# EAGLE board ReactionGame (EAGLE 6.0)
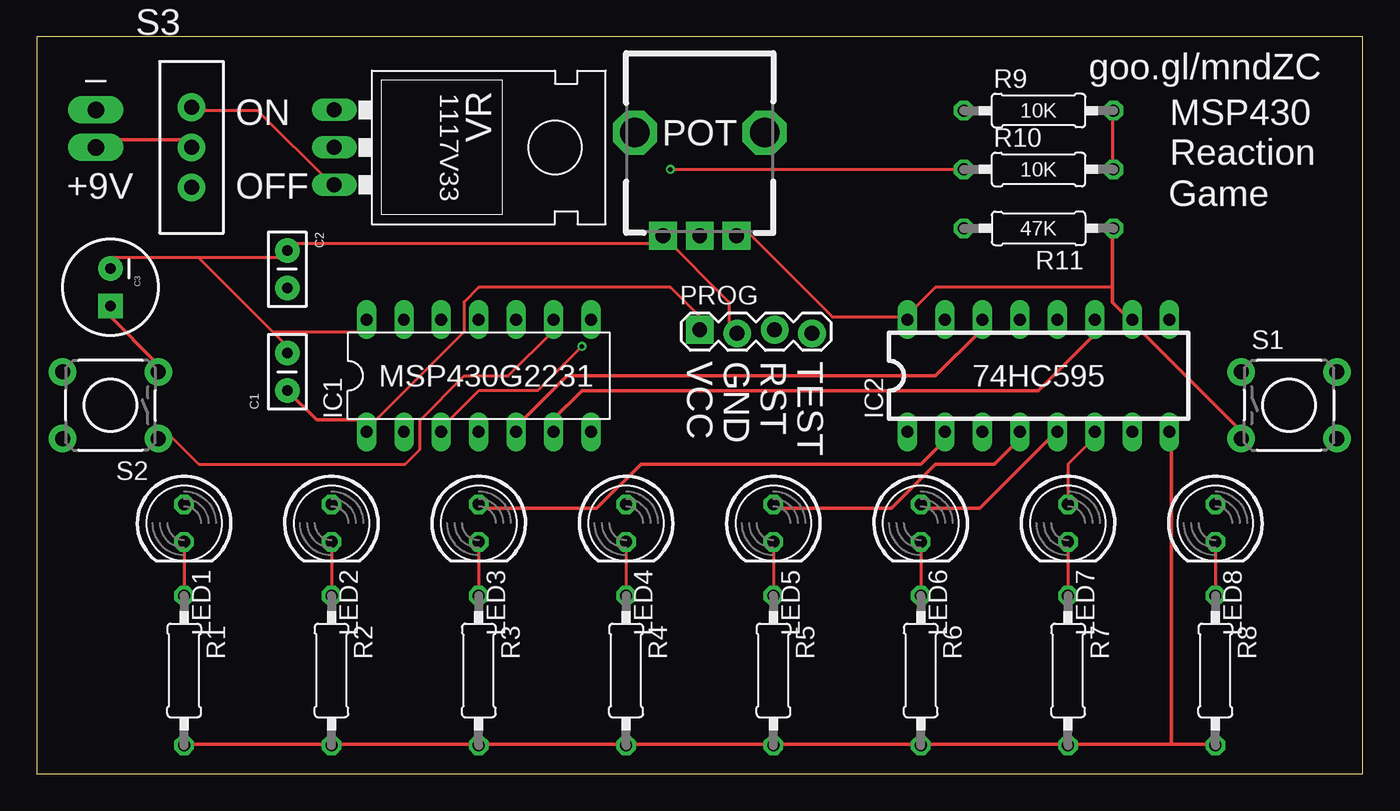
[diagram p0: board, top side]
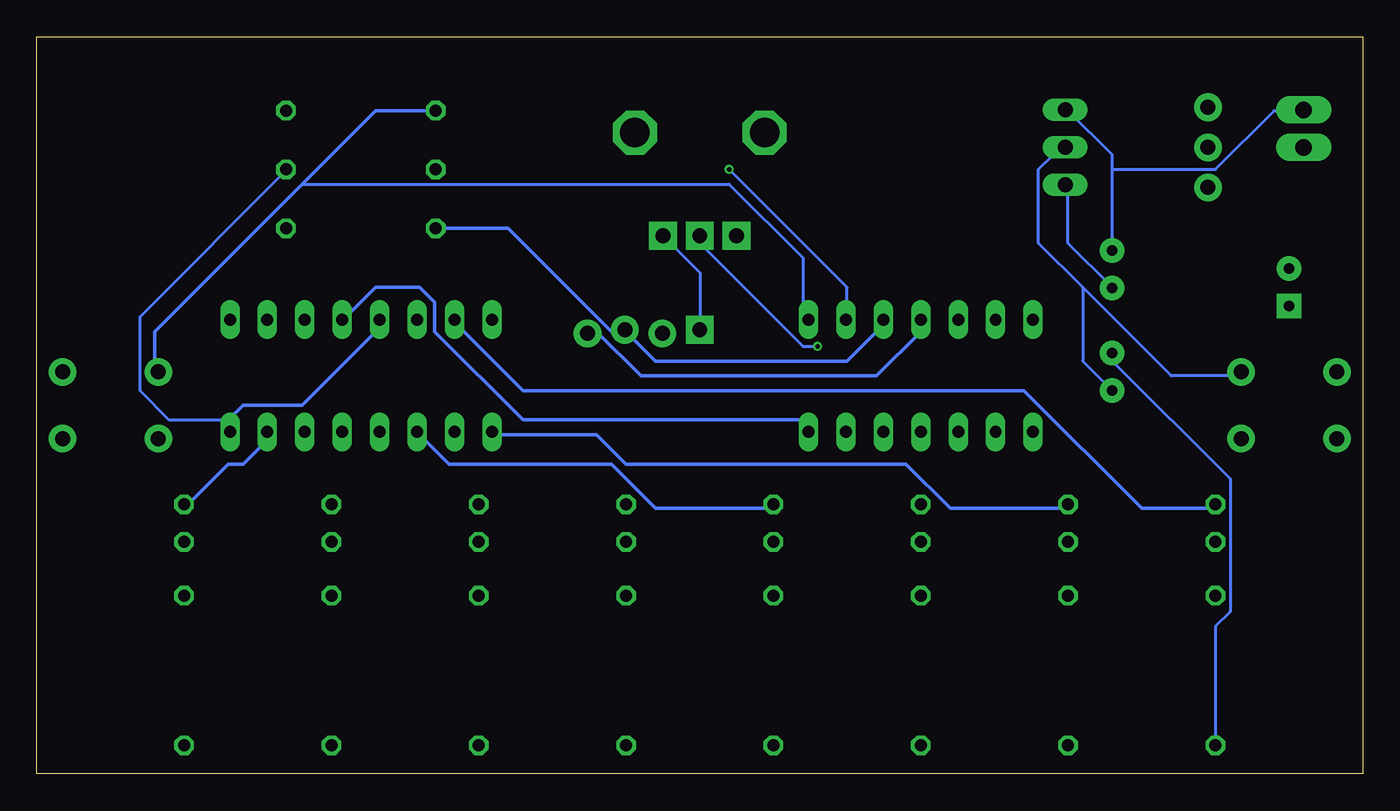
[diagram p1: board, bottom side, seen from below]

Size 90 x 50 mm. Coordinates in mm from the lower left corner, seen from the top.
Outline: 0,0 90,0 90,50 0,50 0,0
Copper layers (1*16): Top 0.035mm / dielectric 1.5mm / Bottom 0.035mm
Design rules: minimum track width 8mil, minimum drill 12mil, track to track 6mil, track to pad 6mil, pad to pad 6mil, via to via 6mil, smd to smd 0mil, copper to edge 10mil, drill to drill 10mil, minimum pad ring 10mil, minimum via ring 6mil, stop-mask expansion 2mil, vias tented up to drill 100mil, thermal gap 10mil

## Footprints (pad centres in the part's own frame; a part is rotated, then mirrored left to right if it is on the bottom)
1X02_LONGPADS = drill 1.118 pad 1.88 long: 1 0,0; 2 2.54,0
CAP-PTH-SMALL2 = drill 0.7 pad 1.651: 1 0,0; 2 2.54,0
CPOL-RADIAL-100UF-25V = drill 0.7 pad 1.651 square: 1 1.27,0 | drill 0.7 pad 1.651: 2 -1.27,0
N14 = drill 0.813 long: 1 -7.625,-3.81; 2 -5.085,-3.81; 3 -2.545,-3.81; 4 -0.005,-3.81; 5 2.535,-3.81; 6 5.075,-3.81; 7 7.615,-3.81; 8 7.615,3.81; 9 5.075,3.81; 10 2.535,3.81; 11 -0.005,3.81; 12 -2.545,3.81; 13 -5.085,3.81; 14 -7.625,3.81
DIL16 = drill 0.813 long: 1 -8.89,-3.81; 2 -6.35,-3.81; 3 -3.81,-3.81; 4 -1.27,-3.81; 5 1.27,-3.81; 6 3.81,-3.81; 7 6.35,-3.81; 8 8.89,-3.81; 9 8.89,3.81; 10 6.35,3.81; 11 3.81,3.81; 12 1.27,3.81; 13 -1.27,3.81; 14 -3.81,3.81; 15 -6.35,3.81; 16 -8.89,3.81
LED5MM = drill 0.813 octagon: A -1.27,0; K 1.27,0
1X04_LOCK = drill 1.016 pad 1.88 square: 1 0,0.127 | drill 1.016 pad 1.88: 2 2.54,-0.127; 3 5.08,0.127; 4 7.62,-0.127
0207/10 = drill 0.813 octagon: 1 -5.08,0; 2 5.08,0
TACTILE-PTH = drill 1.016 pad 1.88: 1 -3.251,2.261; 2 3.251,2.261; 3 -3.251,-2.261; 4 3.251,-2.261
SWITCH-SPDT_KIT = drill 1.016 pad 1.88: 1 0,2.718; 2 0,0; 3 0,-2.718
ALPS_POT = drill 1 pad 1.88 square: P$1 7,-2.5; P$2 7,0; P$3 7,2.5 | drill 2 octagon: P$4 0,-4.4; P$5 0,4.4
78XXL = drill 1.016 long: GND 0,-3.81; IN -2.54,-3.81; OUT 2.54,-3.81

## Placement (x,y rotation side)
9V_IN  [1X02_LONGPADS]  4,42.5 90 top
C1  0.1uF  [CAP-PTH-SMALL2]  17,26 90 top
C2  0.1uF  [CAP-PTH-SMALL2]  17,35.5 270 top
C3  10uF  [CPOL-RADIAL-100UF-25V]  5,33 270 top
IC1  MSP430G2231  [N14]  30,27 0 top
IC2  74HC595  [DIL16]  68,27 0 top
LED1  [LED5MM]  10,17 270 top
LED2  [LED5MM]  20,17 270 top
LED3  [LED5MM]  30,17 270 top
LED4  [LED5MM]  40,17 270 top
LED5  [LED5MM]  50,17 270 top
LED6  [LED5MM]  60,17 270 top
LED7  [LED5MM]  70,17 270 top
LED8  [LED5MM]  80,17 270 top
PROG  [1X04_LOCK]  45,30 0 top
R1  150  [0207/10]  10,7 270 top
R2  150  [0207/10]  20,7 270 top
R3  150  [0207/10]  30,7 270 top
R4  150  [0207/10]  40,7 270 top
R5  150  [0207/10]  50,7 270 top
R6  150  [0207/10]  60,7 270 top
R7  150  [0207/10]  70,7 270 top
R8  150  [0207/10]  80,7 270 top
R9  10k  [0207/10]  68,45 0 top
R10  10k  [0207/10]  68,41 0 top
R11  47k  [0207/10]  68,37 180 top
S1  [TACTILE-PTH]  85,25 0 top
S2  [TACTILE-PTH]  5,25 180 top
S3  [SWITCH-SPDT_KIT]  10.5,42.5 0 top
U$2  10k  [ALPS_POT]  45,43.5 270 top
VR  LD1117V33  [78XXL]  24,42.5 270 top

## Library data of the parts
9V_IN C1-C3 IC2 PROG S1-S3 U$2 VR = SparkFun
IC1 = TI_MSP430_v16
LED1-LED8 = led
R1-R11 = resistor

## Nets
N$1: LED1.K R1.1
N$2: LED2.K R2.1
N$3: LED3.K R3.1
N$4: LED4.K R4.1
N$5: LED5.K R5.1
N$6: LED6.K R6.1
N$7: LED7.K R7.1
N$8: LED8.K R8.1
N$9: IC2.15 LED1.A
N$10: IC2.1 LED2.A
N$11: IC2.2 LED3.A
N$12: IC2.3 LED4.A
N$13: IC2.4 LED5.A
N$14: IC2.5 LED6.A
N$15: IC2.6 LED7.A
N$16: IC2.7 LED8.A
N$17: IC1.3 U$2.P$2
N$18: IC1.10 PROG.3 R11.2
N$20: IC1.5 IC2.14
N$21: IC1.7 IC2.12
N$22: IC1.6 IC2.11
N$23: IC1.8 R9.1 S1.1
N$25: IC1.9 R10.1 S2.1
N$26: 9V_IN.2 C1.2 C2.1 C3.2 IC1.14 IC2.8 IC2.13 PROG.2 R1.2 R2.2 R3.2 R4.2 R5.2 R6.2 R7.2 R8.2 R9.2 R10.2 U$2.P$1 VR.IN
N$27: IC1.11 PROG.4
N$28: 9V_IN.1 S3.2
N$29: C2.2 S3.1 VR.OUT
N$30: C1.1 C3.1 IC1.1 IC2.10 IC2.16 PROG.1 R11.1 S1.3 S2.3 U$2.P$3 VR.GND

## Tracks (layer width: path | path; a pad name or v marks a point on that pad's centre or on a via)
N$1
  Top 0.203: 10,12 R1.1 LED1.K 10,16
N$2
  Top 0.203: 20,12 R2.1 LED2.K 20,16
N$3
  Top 0.203: 30,12 R3.1 LED3.K 30,16
N$4
  Top 0.203: 40,12 R4.1 LED4.K 40,16
N$5
  Top 0.203: 50,12 R5.1 LED5.K 50,16
N$6
  Top 0.203: 60,12 R6.1 LED6.K 60,16
N$7
  Top 0.203: 70,12 R7.1 LED7.K 70,16
N$8
  Top 0.203: 80,12 R8.1 LED8.K 80,16
N$9
  Bottom 0.254: LED1.A 10,18 15,18 23,26 57,26 61,30 IC2.15
N$10
  Bottom 0.254: LED2.A 20,18 28,18 31,21 50,21 52,23 59,23 IC2.1
N$11
  Top 0.254: LED3.A 30,18 38,18 41,21 60,21 62,23 IC2.2
N$12
  Bottom 0.254: LED4.A 40,18 48,18 51,21 62,21 64,23 IC2.3
N$13
  Top 0.254: LED5.A 50,18 58,18 61,21 65,21 67,23 IC2.4
N$14
  Top 0.254: LED6.A 60,18 64,18 69,23 IC2.5
N$15
  Top 0.203: 70,18 LED7.A 70,21 72,23 IC2.6
N$16
  Bottom 0.254: LED8.A 80,18 77,21 76,21 74,23 IC2.7
N$17  (via drill 0.3)
  Top 0.203: v37,29 34,26 30,26 28,24 IC1.3
  Bottom 0.203: v37,29 38,29 45,36 U$2.P$2
N$18
  Bottom 0.254: IC1.10 33,30 35,28 48,28 50,30 PROG.3 51,30 58,37 63,37 R11.2
N$20
  Top 0.254: IC1.5 33,24 36,27 61,27 64,30 IC2.14
N$21
  Bottom 0.254: IC1.7 38,24 57,24 63,30 63,32 64,33 67,33 69,31 IC2.12
N$22
  Top 0.254: IC1.6 35,24 37,26 68,26 72,30 IC2.11
N$23
  Bottom 0.203: 72,40 43,40 38,35 38,31 IC1.8 | 72,40
  Bottom 0.254: S1.1 82,28 82,30 72,40 67,45 63,45 R9.1
N$25  (via drill 0.3)
  Top 0.203: IC1.9 35,30 32,27 29,27 26,24 26,22 25,21 11,21 9,23 S2.1 | v43,41 R10.1 63,41
  Bottom 0.203: 63,41 R10.1 | v43,41 35,33 35,31 IC1.9
N$26
  Top 0.203: 11,35 17,35 C2.1 17,36 42,36 U$2.P$1 47,32 47,30 PROG.2 | 11,35 5,35 C3.2 | 11,35 16,30 | 16,30 17,29 C1.2 | R10.2 73,41 73,45 R9.2 | 16,30 22,30 IC1.14
  Top 0.254: 20,2 10,2 R1.2 | 20,2 30,2 | 20,2 R2.2 | 30,2 40,2 | 30,2 R3.2 | 40,2 50,2 | 40,2 R4.2 | 50,2 60,2 | 50,2 R5.2 | 60,2 70,2 | 60,2 R6.2 | 70,2 77,2 | 77,2 80,2 R8.2 | 70,2 R7.2 | 77,2 77,23 IC2.8
  Bottom 0.203: R1.2 10,10 9,11 9,20 17,28 C1.2 | C2.1 17,41 | 17,41 17,42 20,45 VR.IN | 17,41 10,41 6,45 4,45 9V_IN.2 | R10.2 73,41 83,31 83,26 81,24 77,24 IC2.8
  Bottom 0.254: IC2.13 67,30 72,25 76,25 77,24 IC2.8
N$27
  Bottom 0.254: IC1.11 30,30 33,27 49,27 52,30 PROG.4
N$28
  Top 0.254: 9V_IN.1 4,43 10,43 S3.2
N$29
  Top 0.203: S3.1 11,45 15,45 20,40 VR.OUT
  Bottom 0.203: VR.OUT 20,40 20,36 17,33 C2.2
N$30
  Top 0.203: 59,31 54,31 48,37 U$2.P$3 | 59,31 61,33 73,33 | 59,31 IC2.16 | IC1.1 23,24 29,30 29,32 30,33 43,33 45,31 PROG.1
  Top 0.254: C3.1 5,31 8,28 S2.3 | C1.1 19,24 22,24 IC1.1 | C1.1 | S1.3 82,23 75,30 IC2.10 74,31 73,32 73,33 73,37 R11.1
  Bottom 0.203: 19,33 13,27 9,27 S2.3 | 19,33 22,36 22,41 21,42 VR.GND | C1.1 19,28 19,33 | PROG.1 45,34 U$2.P$3

## Text on the board
tPlace: _ | goo.gl/mndZC | 10K | ON | POT | MSP430 | 1117V33 | 10K | Reaction | +9V | OFF | Game | 47K | VCC | GND | RST | TEST | MSP430G2231 | 74HC595